# EAGLE board Final_5 (EAGLE 9.2.2)
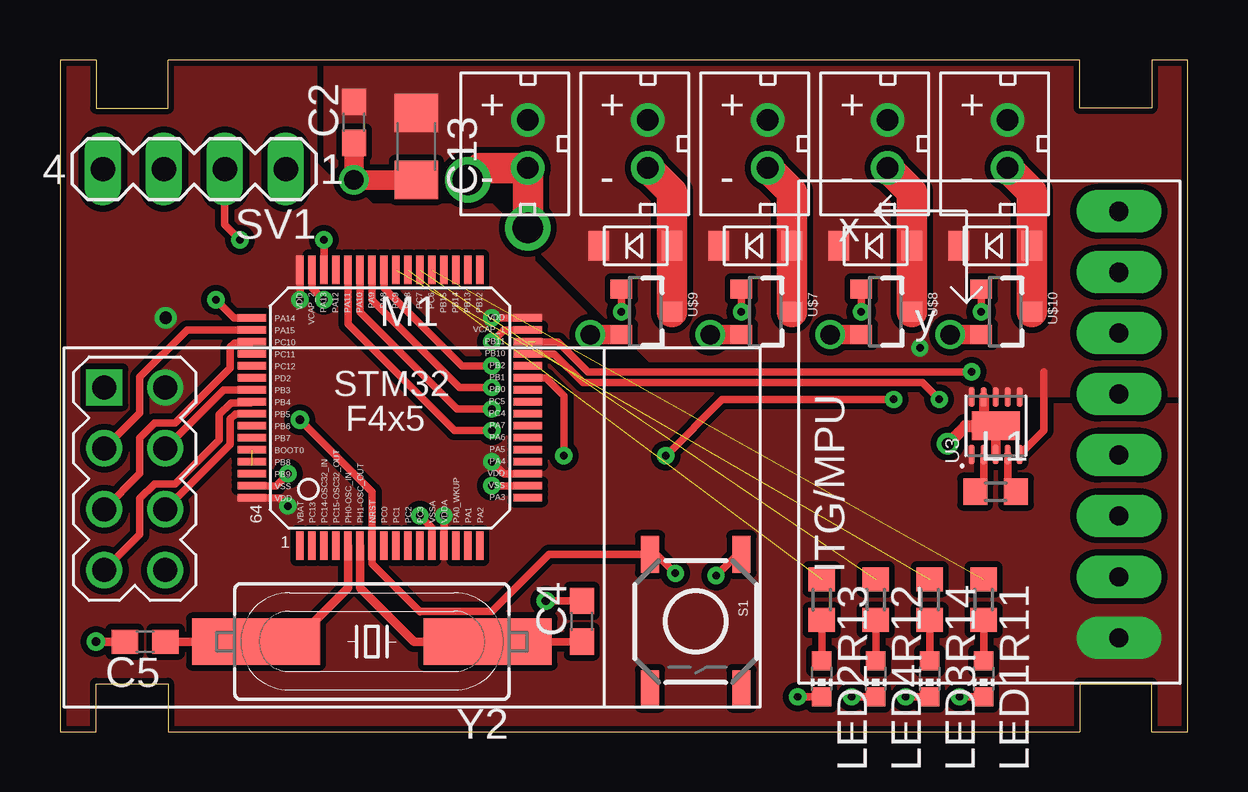
[diagram p0: board, top side]
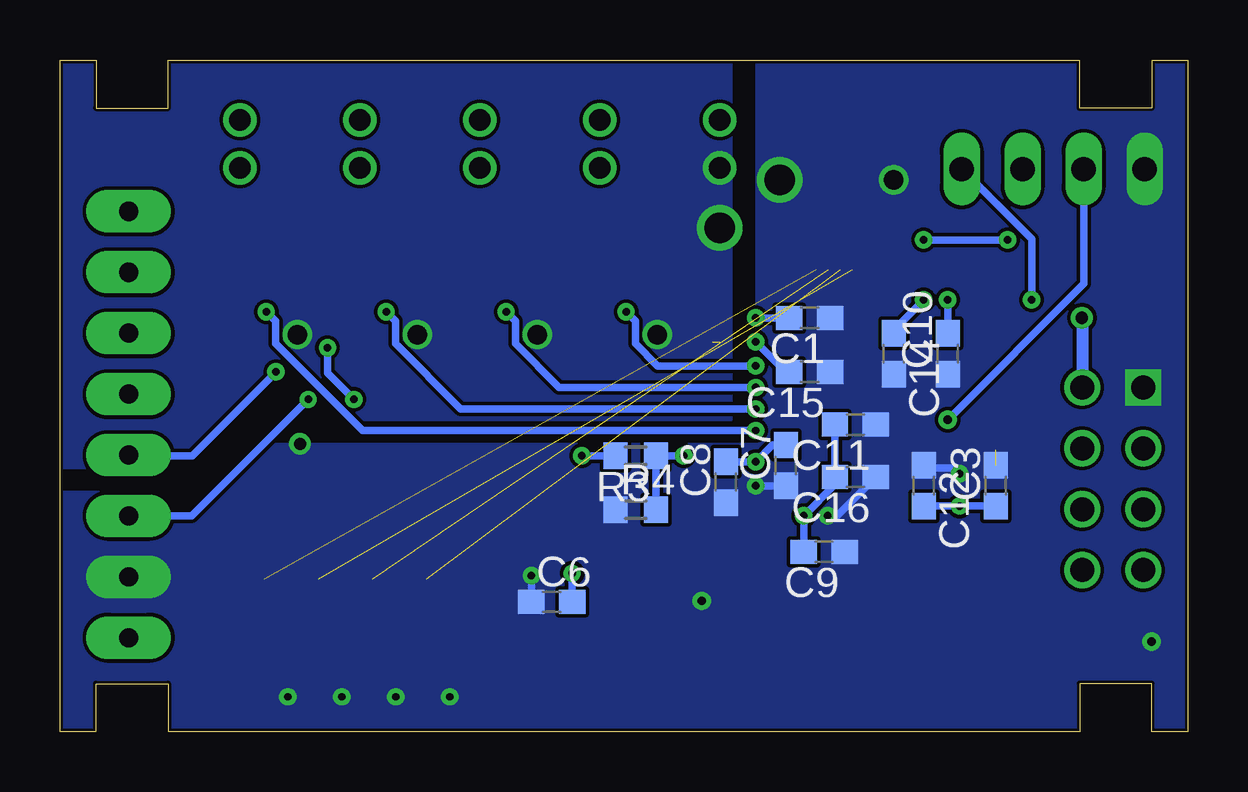
[diagram p1: board, bottom side, seen from below]

Size 47 x 28 mm. Coordinates in mm from the lower left corner, seen from the top.
Outline: 0,0 1.5,0 1.5,2 4.5,2 4.5,0 42.5,0 42.5,2 45.5,2 45.5,0 47,0 47,28 45.5,28 45.5,26 42.5,26 42.5,28 4.5,28 4.5,26 1.5,26 1.5,28 0,28 0,0
Copper layers (1*16): Top 0.035mm / dielectric 1.5mm / Bottom 0.035mm
Design rules "default *": minimum track width 6mil, minimum drill 0.35mm, track to track 6mil, track to pad 6mil, pad to pad 6mil, via to via 6mil, smd to smd 6mil, copper to edge 5mil, drill to drill 6mil, minimum pad ring 10mil, minimum via ring 8mil, stop-mask expansion 4mil, vias tented up to drill 0mil, thermal gap 10mil

## Footprints (pad centres in the part's own frame; a part is rotated, then mirrored left to right if it is on the bottom)
C0603 = smd 1.1 x 1: 1 -0.85,0; 2 0.85,0
C1206 = smd 1.6 x 1.8: 1 -1.4,0; 2 1.4,0
L0603 = smd 1 x 1.1: 1 -0.85,0; 2 0.85,0
CHIP-LED0603 = smd 0.8 x 0.8: A 0,-0.75; C 0,0.75
WIRELESS-NRF24L01 = drill 1 square: 1 -12.7,6.35 | drill 1: 2 -10.16,6.35; 3 -12.7,3.81; 4 -10.16,3.81; 5 -12.7,1.27; 6 -10.16,1.27; 7 -12.7,-1.27; 8 -10.16,-1.27
R0603 = smd 1 x 1.1: 1 -0.85,0; 2 0.85,0
TACTILE-SWITCH-SMD = smd 1.524 x 0.762: 1 -2.794,1.905; 2 2.794,1.905; 3 -2.794,-1.905; 4 2.794,-1.905
MA04-1 = drill 1.016 long: 1 -3.81,0; 2 -1.27,0; 3 1.27,0; 4 3.81,0
GY-521 = drill 0.8 pad 1.778 long: ADO -8.89,-6.35; GND -8.89,6.35; INT -8.89,-8.89; SCL -8.89,3.81; SDA -8.89,1.27; VCC -8.89,8.89; XCL -8.89,-3.81; XDA -8.89,-1.27
SON50P250X250X80-11N = smd 0.81 x 0.27: 1 -1.205,1; 2 -1.205,0.5; 3 -1.205,0; 4 -1.205,-0.5; 5 -1.205,-1; 6 1.205,-1; 7 1.205,-0.5; 8 1.205,0; 9 1.205,0.5; 10 1.205,1 | smd 1.2 x 2: 11 0,0
STM32F405/415_LQFP64 = smd 1.2 x 0.3: BOOT0 -5.75,-1.75; PA3 5.75,-3.75; PA4 5.75,-2.25; PA5 5.75,-1.75; PA6 5.75,-1.25; PA7 5.75,-0.75; PA14 -5.75,3.75; PA15 -5.75,3.25; PB0 5.75,0.75; PB1 5.75,1.25; PB2 5.75,1.75; PB3 -5.75,0.75; PB4 -5.75,0.25; PB5 -5.75,-0.25; PB6 -5.75,-0.75; PB7 -5.75,-1.25; PB8 -5.75,-2.25; PB9 -5.75,-2.75; PB10 5.75,2.25; PB11 5.75,2.75; PC4 5.75,-0.25; PC5 5.75,0.25; PC10 -5.75,2.75; PC11 -5.75,2.25; PC12 -5.75,1.75; PD2 -5.75,1.25; VCAP_1 5.75,3.25; VDD_0 5.75,-2.75; VDD_1 5.75,3.75; VDD_3 -5.75,-3.75; VSS_0 5.75,-3.25; VSS_1 -5.75,-3.25 | smd 0.3 x 1.2: NRST -0.75,-5.75; PA0_WKUP 2.75,-5.75; PA1 3.25,-5.75; PA2 3.75,-5.75; PA8 -0.25,5.75; PA9 -0.75,5.75; PA10 -1.25,5.75; PA11 -1.75,5.75; PA12 -2.25,5.75; PA13 -2.75,5.75; PB12 3.75,5.75; PB13 3.25,5.75; PB14 2.75,5.75; PB15 2.25,5.75; PC0 -0.25,-5.75; PC1 0.25,-5.75; PC2 0.75,-5.75; PC3 1.25,-5.75; PC6 1.75,5.75; PC7 1.25,5.75; PC8 0.75,5.75; PC9 0.25,5.75; PC13 -3.25,-5.75; PC14 -2.75,-5.75; PC15 -2.25,-5.75; PH0 -1.75,-5.75; PH1 -1.25,-5.75; VBAT -3.75,-5.75; VCAP_2 -3.25,5.75; VDD_2 -3.75,5.75; VDDA 2.25,-5.75; VSSA 1.75,-5.75
JST_CONNECTOR_FEMALE = drill 0.889: + 0,1; - 0,-1
SOT23-3 = smd 0.8 x 0.9: 1 -0.95,-1; 2 0.95,-1; 3 0,1.1
MINI2-F3-B = smd 1.22 x 0.85: NEG 0,1.55; POS 0,-1.5
HC49UP = smd 5.334 x 1.93: 1 -4.826,0; 2 4.826,0

## Placement (x,y rotation side)
C1  100nF  [C0603]  15.75,17.25 180 bottom
C2  10uF  [C0603]  12.25,25.4 90 top
C3  22uF  [C0603]  8,10.25 90 bottom
C4  16pF  [C0603]  21.75,4.6 90 top
C5  16pF  [C0603]  3.55,3.75 180 top
C6  1uF  [C0603]  26.5,5.4 0 bottom
C7  100nF  [C0603]  16.75,11.1 90 bottom
C8  10uF  [C0603]  19.25,10.4 90 bottom
C9  100nF  [C0603]  15.15,7.5 180 bottom
C10  100nF  [C0603]  10,15.75 90 bottom
C11  100nF  [C0603]  13.85,12.8 180 bottom
C12  100nF  [C0603]  11,10.25 270 bottom
C13  100uF  [C1206]  14.85,24.4 270 top
C14  2.2uF  [C0603]  12.25,15.75 270 bottom
C15  2.2uF  [C0603]  15.75,15 180 bottom
C16  4.7uF  [C0603]  13.85,10.62 180 bottom
L1  2.2uH  [L0603]  39,10 0 top
LED1  Blue  [CHIP-LED0603]  38.5,2.2 180 top
LED2  Green  [CHIP-LED0603]  31.75,2.2 180 top
LED3  Green  [CHIP-LED0603]  36.25,2.2 180 top
LED4  Blue  [CHIP-LED0603]  34,2.2 180 top
M1  WIRELESS-NRF24L01  [WIRELESS-NRF24L01]  14.55,8 0 top
R3  10k  [R0603]  23,11.5 180 bottom
R4  10k  [R0603]  23,9.25 0 bottom
R11  300  [R0603]  38.5,5.5 270 top
R12  300  [R0603]  34,5.5 270 top
R13  300  [R0603]  31.75,5.5 270 top
R14  300  [R0603]  36.25,5.5 270 top
S1  SWITCH-MOMENTARY-2SMD  [TACTILE-SWITCH-SMD]  26.5,4.59 270 top
SV1  [MA04-1]  5.6,23.45 180 top
U2  GY-521MPU6050  [GY-521]  35.25,12.8 180 top
U3  RT6150B-33GQW  [SON50P250X250X80-11N]  39,12.75 90 top
U$1  STM32F405/415_LQFP64  [STM32F405/415_LQFP64]  13.75,13.5 0 top
U$2  JST_CONNECTOR_FEMALE  [JST_CONNECTOR_FEMALE]  19.5,24.5 0 top
U$3  JST_CONNECTOR_FEMALE  [JST_CONNECTOR_FEMALE]  24.5,24.5 0 top
U$4  JST_CONNECTOR_FEMALE  [JST_CONNECTOR_FEMALE]  29.5,24.5 0 top
U$5  JST_CONNECTOR_FEMALE  [JST_CONNECTOR_FEMALE]  34.5,24.5 0 top
U$6  JST_CONNECTOR_FEMALE  [JST_CONNECTOR_FEMALE]  39.5,24.5 0 top
U$7  N-CHANNEL-MOSFET-IRLML6244TRPBF  [SOT23-3]  29.4,17.5 270 top
U$8  N-CHANNEL-MOSFET-IRLML6244TRPBF  [SOT23-3]  34.4,17.5 270 top
U$9  N-CHANNEL-MOSFET-IRLML6244TRPBF  [SOT23-3]  24.4,17.5 270 top
U$10  N-CHANNEL-MOSFET-IRLML6244TRPBF  [SOT23-3]  39.4,17.5 270 top
U$11  DB2W40300L  [MINI2-F3-B]  24,20.25 90 top
U$12  DB2W40300L  [MINI2-F3-B]  34,20.25 90 top
U$13  DB2W40300L  [MINI2-F3-B]  29,20.25 90 top
U$14  DB2W40300L  [MINI2-F3-B]  39,20.25 90 top
Y2  12MHz  [HC49UP]  13,3.75 180 top

## Library data of the parts
C1-C13 C16 = rcl; SPICEPREFIX: C
C14 C15 = rcl
L1 = rcl-2
LED1-LED4 = led
M1 U2 U$1-U$6 U$11-U$14 Y2 = AP_quad
R3 R4 R11-R14 = rcl; SPICEPREFIX: R
S1 = AP_quad; PROD_ID: SWCH-08247
SV1 = con-lstb; OC_FARNELL: unknown; OC_NEWARK: unknown
U3 = RT6150B-33GQW; DESCRIPTION: Dc/Dc Conv, Buck-Boost, 1mhz, Wdfn-10; DIGI-KEY_PART_NUMBER: RT6150B-33GQWCT-ND; DIGI-KEY_PURCHASE_URL: https://www.digikey.com/product-detail/en/richtek-usa-inc/RT6150B-33GQW/RT6150B-33GQWCT-ND/6676777?utm_source=snapeda&utm_medium=aggregator&utm_campaign=symbol; MF: Richtek USA; MP: RT6150B-33GQW; PACKAGE: WFDFN-10 Richtek
U$7-U$10 = AP_quad; DATASHEET: http://www.mouser.com/ds/2/196/irlml6244pbf-936666.pdf; MOUSER: 942-IRLML6244TRPBF; URL: http://www.mouser.com/Search/ProductDetail.aspx?R=IRLML6244TRPBFvirtualkey57370000virtualkey942-IRLML6244TRPBF

## Nets
3.7V: C2.2 C13.1 R3.2 U3.5 U3.6 U3.7 U3.8 U$2.+ U$3.+ U$4.+ U$5.+ U$6.+ U$11.NEG U$12.NEG U$13.NEG U$14.NEG
ANALOG: R3.1 R4.2 U$1.PB1
CE: M1.3 U$1.PA15
CSN: M1.4 U$1.PB3
GND: C1.1 C2.1 C3.2 C4.2 C5.2 C6.1 C7.1 C8.1 C9.1 C10.1 C11.1 C12.1 C13.2 C14.2 C15.1 C16.1 LED1.C LED2.C LED3.C LED4.C M1.1 R4.1 S1.1 SV1.4 U2.GND U3.3 U3.9 U3.11 U$1.BOOT0 U$1.VSS_0 U$1.VSS_1 U$1.VSSA U$2.- U$7.2 U$8.2 U$9.2 U$10.2
LED_MISO: R14.1 U$1.PC9
LED_PWR: R11.1 U$1.PC6
LED_RST: R12.1 U$1.PC7
LED_SWDIO: R13.1 U$1.PC8
MISO: M1.7 U$1.PB4
MOSI: M1.6 U$1.PB5
N$1: L1.2 U3.4
N$2: L1.1 U3.2
N$4: U$3.- U$9.3 U$11.POS
N$5: U$5.- U$8.3 U$12.POS
N$6: U$4.- U$7.3 U$13.POS
N$7: U$6.- U$10.3 U$14.POS
N$8: LED1.A R11.2
N$9: LED4.A R12.2
N$10: LED2.A R13.2
N$11: LED3.A R14.2
N$12: C15.2 U$1.VCAP_1
N$13: C14.1 U$1.VCAP_2
OSC_IN: C5.1 U$1.PH0 Y2.2
OSC_OUT: C4.1 U$1.PH1 Y2.1
RESET: C6.2 S1.3 SV1.3 U$1.NRST
SCK: M1.5 U$1.PC10
SCL: U2.SCL U$1.PB10
SDA: U2.SDA U$1.PB11
SWCLK: SV1.1 U$1.PA14
SWDIO: SV1.2 U$1.PA13
TIM1: U$1.PA11 U$10.1
TIM2: U$1.PA10 U$8.1
TIM3: U$1.PA9 U$7.1
TIM4: U$1.PA8 U$9.1
VOUT: C1.2 C3.1 C7.2 C8.2 C9.2 C10.2 C11.2 C12.2 C16.2 M1.2 U2.VCC U3.1 U3.10 U$1.VDD_0 U$1.VDD_1 U$1.VDD_2 U$1.VDD_3 U$1.VDDA

## Tracks (layer width: path | path; a pad name or v marks a point on that pad's centre or on a via)
3.7V  (via drill 0.3)
  Top 0.305: v25.25,11.5 27.6,13.85 v34.75,13.85 | U3.5 41,12.54 41,15
  Bottom 0.305: R3.2 v25.25,11.5 | v34.75,13.85 35.85,14.95 v35.85,16
  pour Top (isolate 0.254, no thermals): 11,28 11,24 13,22 18,22 25,15 38,15 39,14 47,14 47,28
ANALOG  (via drill 0.3)
  Top 0.305: U$1.PB1 20.25,14.75 21,14 v21,11.5
  Bottom 0.305: R4.2 R3.1 v21,11.5
CE
  Top 0.305: M1.3 3.33,13.29 3.33,14.79 5.29,16.75 U$1.PA15
CSN
  Top 0.305: M1.4 6.83,14.25 U$1.PB3
GND  (via drill 0.3, 0.34, 0.35, 0.5, 0.81, 1.27)  (1 unrouted)
  Top 0.304: v20.25,5.45 C4.2
  Top 0.305: U$1.VSS_1 9,10.25 v9.5,10.75 | v18,10.25 U$1.VSS_0 | U$1.VSSA 15.5,8.5 v15,9 | S1.1 28.23,7.38 v27.35,6.5 | LED2.C v30.75,1.45 | v33,1.45 LED4.C | v35.25,1.45 LED3.C | v37.5,1.45 LED1.C
  Top 0.345: C5.2 v1.5,3.75
  Top 0.39: U3.3 U3.11
  Top 0.406: U3.9 38.5,13.25 U3.11
  Top 0.5: v37,12 37.75,12.75 U3.11
  Top 0.813: C2.1 v12.25,23 C13.2 | v22.1,16.55 U$9.2 | v27.1,16.55 U$7.2 | v32.1,16.55 U$8.2 | v37.1,16.55 U$10.2
  Top 1.27: v19.5,21 U$2.- 17.5,23.5 v17,23
  Bottom 0.305: C12.1 10.9,11 9.75,11 v9.5,10.75 | C7.1 v18,10.25 | C16.1 14.62,9 v15,9 | C6.1 v27.35,6.5
  pour Bottom (no thermals): 47,28 47,11 42,11 40,13 20,13 19,13 19,28
  pour Bottom (no thermals): 47,10 47,0 0,0 0,28 18,28 18,12 40,12 42,10
LED_MISO  (1 unrouted)
LED_PWR  (1 unrouted)
LED_RST  (1 unrouted)
LED_SWDIO  (1 unrouted)
MISO
  Top 0.152: 7.43,13.75 U$1.PB4
  Top 0.305: M1.7 3.33,8.21 3.33,9.71 3.95,10.33 4.8,10.33 6.64,12.16 6.64,13.22 7.13,13.71 7.96,13.71 U$1.PB4
MOSI
  Top 0.152: 7.43,13.25 U$1.PB5
  Top 0.305: M1.6 7.09,11.97 7.09,13.03 7.32,13.25 7.43,13.25
N$1
  Top 0.305: U3.4 39.5,10.35 L1.2
N$2
  Top 0.305: U3.2 38.5,10.35 L1.1
N$4
  Top 1.27: U$3.- 25.5,22.5 U$11.POS U$9.3
N$5
  Top 1.27: U$5.- 35.5,22.5 U$12.POS U$8.3
N$6
  Top 1.27: U$4.- 30.5,22.5 U$13.POS U$7.3
N$7
  Top 1.27: U$6.- 40.5,22.5 U$14.POS U$10.3
N$8
  Top 0.305: R11.2 LED1.A
N$9
  Top 0.305: LED4.A R12.2
N$10
  Top 0.305: LED2.A R13.2
N$11
  Top 0.305: R14.2 LED3.A
N$12  (via drill 0.3)
  Top 0.305: v18,16.25 18.5,16.75 U$1.VCAP_1
  Bottom 0.305: v18,16.25 16.75,15 C15.2
N$13  (via drill 0.3)
  Top 0.305: v11,18 10.5,18.5 U$1.VCAP_2
  Bottom 0.305: v11,18 12.25,16.75 C14.1
OSC_IN
  Top 0.345: C5.1 Y2.2 9.75,3.75 12,6 U$1.PH0
OSC_OUT
  Top 0.304: Y2.1 C4.1
  Top 0.345: 18,3.75 Y2.1 | Y2.1 17.58,4 | U$1.PH1 12.5,6 14.75,3.75 Y2.1
RESET  (via drill 0.3, 0.35)
  Top 0.305: 24.79,6.79 S1.3 | S1.3 24.87,7.38 v25.65,6.6 | S1.3 20.38,7.38 18.02,5.02 15.03,5.02 15.01,5 15,5 13,7 U$1.NRST 13,10 v10,13
  Bottom 0.305: C6.2 v25.65,6.6 | v10,13 4.33,18.67 SV1.3
SCK
  Top 0.152: 7.43,16.25 U$1.PC10
  Top 0.305: M1.5 3.33,10.75 3.33,12.25 3.95,12.87 4.8,12.87 7.09,15.16 7.09,16.03 7.27,16.2 7.96,16.2 U$1.PC10
SCL  (via drill 0.3)
  Top 0.305: U$1.PB10 20.6,15.75 21.81,14.54 35.96,14.54 v36.65,13.85
  Bottom 0.305: U2.SCL 41.51,8.99 v36.65,13.85
SDA  (via drill 0.3)  (1 unrouted)
  Top 0.305: 19.81,16.25 20.75,16.25 22,15 v38,15
  Bottom 0.304: v38,15 41.5,11.5
  Bottom 0.305: 41.5,11.5 44.11,11.5 U2.SDA
SWCLK  (via drill 0.3)
  Top 0.305: U$1.PA14 7.25,17.25 v6.5,18
  Bottom 0.305: v6.5,18 6.5,20.54 SV1.1
SWDIO  (via drill 0.3)
  Top 0.305: v7.5,20.5 6.87,21.13 SV1.2 | v11,20.5 U$1.PA13
  Bottom 0.305: v7.5,20.5 v11,20.5
TIM1  (via drill 0.3)
  Top 0.305: v38.4,17.5 U$10.1 | U$1.PA11 12,17 16.45,12.55 v18,12.55
  Bottom 0.305: v38.4,17.5 38.01,17.11 38.01,16.17 34.39,12.55 v18,12.55
TIM2  (via drill 0.3)
  Top 0.305: v33.4,17.5 U$8.1 | U$1.PA10 12.5,17.5 16.55,13.45 v18,13.45
  Bottom 0.305: v33.4,17.5 33.01,17.11 33.01,16.17 30.29,13.45 v18,13.45
TIM3  (via drill 0.3)
  Top 0.305: v28.4,17.5 U$7.1 | U$1.PA9 13,18 16.65,14.35 v18,14.35
  Bottom 0.305: v28.4,17.5 28.01,17.11 28.01,16.17 26.19,14.35 v18,14.35
TIM4  (via drill 0.3)
  Top 0.305: v23.4,17.5 U$9.1 | U$1.PA8 13.5,18.5 16.75,15.25 v18,15.25
  Bottom 0.305: v23.4,17.5 23.01,17.11 23.01,16.17 22.09,15.25 v18,15.25
VOUT  (via drill 0.3, 0.51)
  Top 0.305: v10,18 U$1.VDD_2 | v18,17.25 U$1.VDD_1 | v9.5,9.4 9.15,9.75 U$1.VDD_3 | U$1.VDD_0 18.5,10.75 v18,11.25 | U$1.VDDA v16,9
  Bottom 0.305: C10.2 v10,18 | C1.2 v18,17.25 | C12.2 v9.5,9.4 C3.1 | C7.2 17.3,11.95 v18,11.25 C8.2 | C9.2 v16,9 14.7,10.3 C16.2 C11.2
  Bottom 0.508: v4.4,17.25 v4.39,17.24 M1.2
  pour Top (isolate 0.254, rank 2, no thermals): 0,28 11,28 11,24 13,22 18,22 25,15 38,15 39,14 47,14 47,0 0,0